# Altium PCB PCB_AUTOOSCILANTE.PcbDoc
Units mil, origin at the board's own origin, x right, y up, seen from the top; angles counter-clockwise.
Board outline 7100 x 2840 mil, 2 copper layers (Top Layer, Bottom Layer); 131 components, 66 nets, 340 pads, 92 vias.
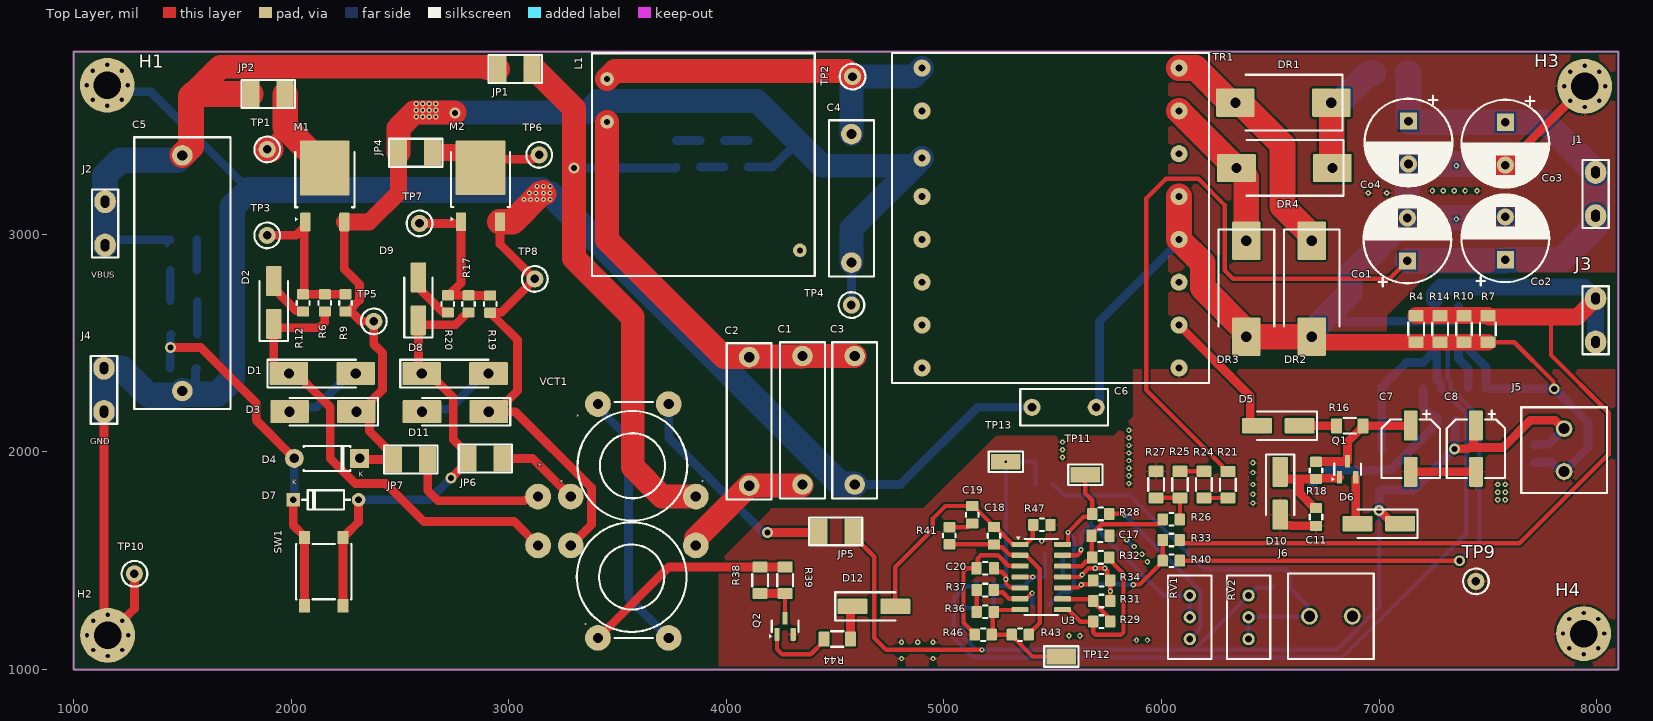
[diagram p0: Top Layer view]
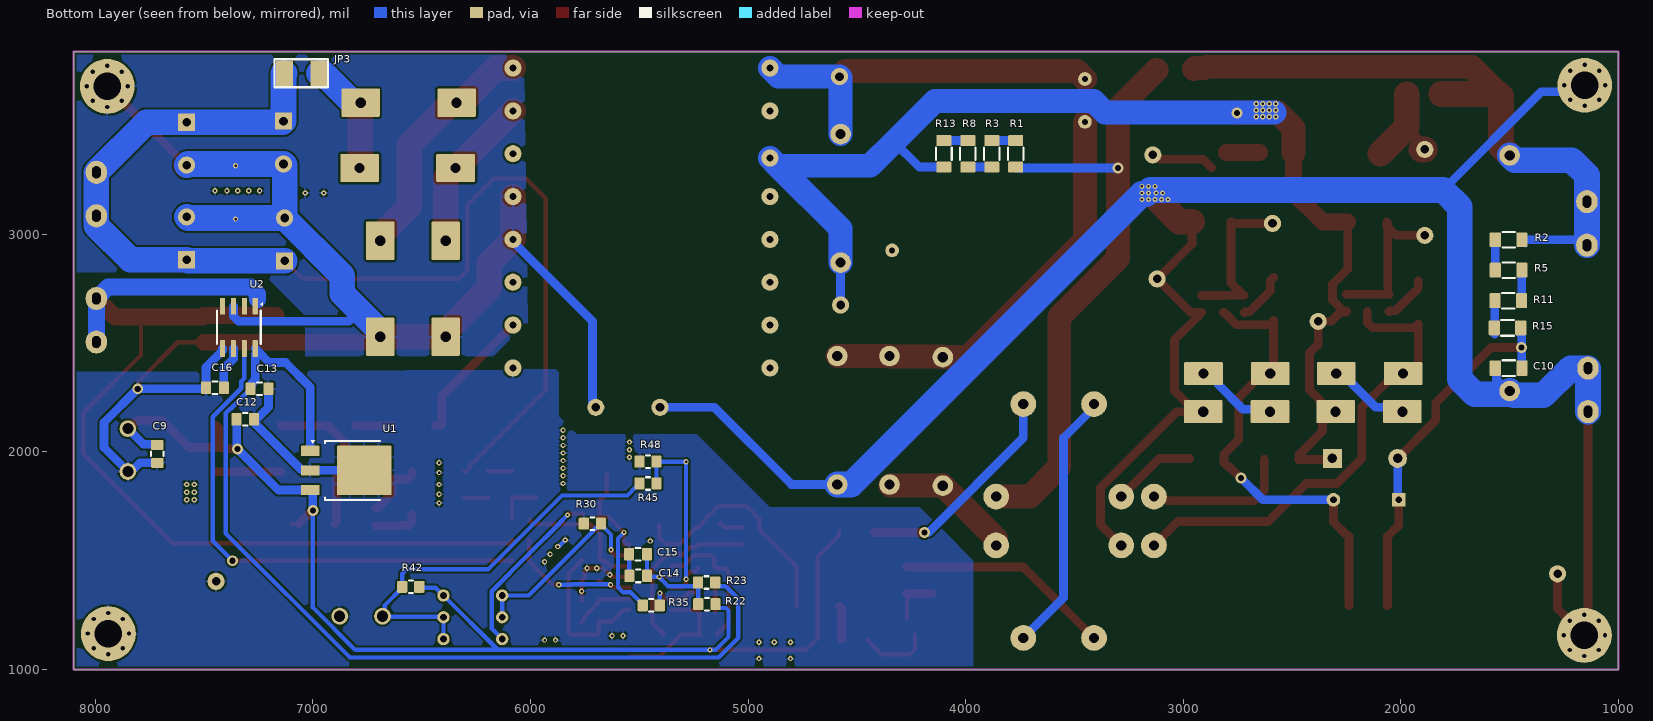
[diagram p1: Bottom Layer view, seen from below]

## Layer stack, top to bottom
Top Solder: solder mask 0.4, Solder Resist, Dk 3.5
Top Layer: signal copper 1.4
Dielectric 1: dielectric 12.6, FR-4, Dk 4.8
Bottom Layer: signal copper 1.4
Bottom Solder: solder mask 0.4, Solder Resist, Dk 3.5

## Board outline
1000,1000 8100,1000 8100,3840 1000,3840

## Design rules (kind name [scope] priority, off if disabled: settings)
Clearance [All] p1: gap=10 ignorepadtopadclearanceinfootprint=FALSE
HoleSize [All] p1: absolutevalues=TRUE maxlimit=150 minlimit=1 maxpercent=80.000 minpercent=20.000
MinimumSolderMaskSliver [All] p1: minsoldermaskwidth=5
NetAntennae [All] p1: netantennaetolerance=100
PolygonConnect [All] p1: connectstyle=Relief reliefconductorwidth=10 reliefentries=4 polygonreliefangle="90 Angle" airgapwidth=10
RoutingVias [All] p1: holewidth=28 width=50 viastyle="Through Hole" minholewidth=10 minwidth=20 maxholewidth=28 maxwidth=50
SilkToSilkClearance [All] p1: silktosilkclearance=5
SilkToSolderMaskClearance [IsPad] p1: minsilkscreentomaskgap=0 clearancetoexposedcopper=TRUE
SolderMaskExpansion [All] p1: expansion=0 istentingtop=FALSE
SupplyNets "Schematic Supply Nets_2" [InNet('i-')] p1: voltage=0.000
SupplyNets "Schematic Supply Nets_1" [InNet('Vcc')] p2: voltage=0.000
SupplyNets "Schematic Supply Nets" [InNet('GND')] p3: voltage=0.000
Width [All] p1: maxlimit=200 minlimit=20 preferedwidth=20 minimp=50.000000 maximp=50.000000 favimp=50.000000
25 further rules are at their usual default settings.

## Components (designator, comment, footprint, x,y, rotation, side; value= is the part's Value field where it differs from the comment)
C1 "~" C_Rect_L18.0mm_W5.0mm_P15.00mm_FKS3_FKP3 4350,1850 r90 top
C2 "~" C_Rect_L18.0mm_W5.0mm_P15.00mm_FKS3_FKP3 4105,1845 r90 top
C3 "~" C_Rect_L18.0mm_W5.0mm_P15.00mm_FKS3_FKP3 4590,1850 r90 top
C4 "~" C_Rect_L18.0mm_W5.0mm_P15.00mm_FKS3_FKP3 4575,2870 r90 top
C5 "1uF" C_Rect_L31.5mm_W11.0mm_P27.50mm_MKS4 1500,3362.68 r270 top
C6 "~" C_Rect_L10.0mm_W4.0mm_P7.50mm_MKS4 5700,2205 r180 top
C7 "C_Polarized_Small" CP_Elec_6.3x5.7 7145,2015 r270 top
C8 "C_Polarized_Small" CP_Elec_6.3x5.7 7445,2015 r270 top
C9 "~" C_0805_2012Metric_Pad1.18x1.45mm_HandSolder 7715,1990.85 r270 bottom
C10 "C_Small" C_1206_3216Metric_Pad1.33x1.80mm_HandSolder 1505,2385 r180 bottom
C11 "~" C_0805_2012Metric_Pad1.18x1.45mm_HandSolder 6710,1700.85 r270 top
C12 "~" C_0805_2012Metric_Pad1.18x1.45mm_HandSolder 7310.85,2150 r0 bottom
C13 "~" C_0805_2012Metric_Pad1.18x1.45mm_HandSolder 7245,2290 r0 bottom
C14 "~" C_0805_2012Metric_Pad1.18x1.45mm_HandSolder 5505,1430 r180 bottom
C15 "~" C_0805_2012Metric_Pad1.18x1.45mm_HandSolder 5505.85,1530 r180 bottom
C16 "~" C_0805_2012Metric_Pad1.18x1.45mm_HandSolder 7450,2295 r180 bottom
C17 "~" C_0805_2012Metric_Pad1.18x1.45mm_HandSolder 5719.15,1615 r180 top
C18 "~" C_0805_2012Metric_Pad1.18x1.45mm_HandSolder 5230,1615 r270 top
C19 "~" C_0805_2012Metric_Pad1.18x1.45mm_HandSolder 5130,1710.85 r270 top
C20 "~" C_0805_2012Metric_Pad1.18x1.45mm_HandSolder 5190,1465 r0 top
Co1 "C_Polarized_Small" CP_Radial_D10.0mm_P5.00mm 7130,2878.15 r90 top
Co2 "C_Polarized_Small" CP_Radial_D10.0mm_P5.00mm 7580,2883.15 r90 top
Co3 "C_Polarized_Small" CP_Radial_D10.0mm_P5.00mm 7580,3515 r270 top
Co4 "C_Polarized_Small" CP_Radial_D10.0mm_P5.00mm 7135,3520 r270 top
D1 "D_Zener_Small_Filled" D_MELF-RM10_Universal_Handsoldering 2143.54,2360 r0 top
D2 "D_Small_Filled" D_SMA_Handsoldering 1920,2686.57 r90 top
D3 "D_Zener_Small_Filled" D_MELF-RM10_Universal_Handsoldering 2146.46,2185 r180 top
D4 "D_Small_Filled" D_DO-41_SOD81_P7.62mm_Horizontal 2315,1970 r180 top
D5 "D_Small_Filled" D_SMA_Handsoldering 6536.57,2120 r180 top
D6 "D_Small_Filled" D_SMA_Handsoldering 6998.43,1670 r180 top
D7 "DIAC" D_DO-35_SOD27_P7.62mm_Horizontal 2010,1780 r0 top
D8 "D_Zener_Small_Filled" D_MELF-RM10_Universal_Handsoldering 2753.54,2360 r0 top
D9 "D_Small_Filled" D_SMA_Handsoldering 2585,2703.43 r90 top
D10 "D_Zener_Small_Filled" D_SMA_Handsoldering 6545,1810 r270 top
D11 "D_Zener_Small_Filled" D_MELF-RM10_Universal_Handsoldering 2755,2185 r180 top
D12 "D_Small_Filled" D_SMA_Handsoldering 4678.43,1290 r0 top
DR1 "D_Small_Filled" D_SMC-RM10_Universal_Handsoldering 6560,3605 r180 top
DR2 "D_Small_Filled" D_SMC-RM10_Universal_Handsoldering 6690.24,2750.24 r270 top
DR3 "D_Small_Filled" D_SMC-RM10_Universal_Handsoldering 6390,2750 r270 top
DR4 "D_Small_Filled" D_SMC-RM10_Universal_Handsoldering 6565,3305 r180 top
H1 "GND" MountingHole_3.2mm_M3_Pad_Via 1155,3685 r0 top
H2 "GND" MountingHole_3.2mm_M3_Pad_Via 1156.81,1156.81 r0 top
H3 "GND" MountingHole_3.2mm_M3_Pad_Via 7945,3680 r0 top
H4 "GND" MountingHole_3.2mm_M3_Pad_Via 7940,1165 r0 top
J1 "Conn_01x02" Faston_5mm 7995,3185 r90 top
J2 "Vbus" Faston_5mm 1145,3050 r90 top
J3 "Conn_01x02" Faston_5mm 7995,2605 r90 top
J4 "GND" Faston_5mm 1140,2285 r90 top
J5 "Conn_01x02" KRE02 7850,2106.85 r270 top
J6 "Conn_01x02" KRE02 6680,1245 r0 top
JP1 "iR" Jumper_Corrente_1mm 3107.48,3760 r0 top
JP2 "iD1" Jumper_Corrente_1mm 1972.48,3645 r0 top
JP3 "iSec" Jumper_Corrente_1mm 7130,3740 r0 bottom
JP4 "iD2" Jumper_Corrente_1mm 2650,3375 r0 top
JP5 "SolderJumper_2_Open" Jumper_Corrente_1mm 4425,1635 r180 top
JP6 "iS1" Jumper_Corrente_1mm 2970,1970 r0 top
JP7 "iS2" Jumper_Corrente_1mm 2627.48,1965 r0 top
L1 "~" EFD_25_13_09_PIN-1-2-10 3895,3320 r0 top
M1 "NMOS" TO-252-2 2155,3255 r90 top
M2 "NMOS" TO-252-2 2870.04,3256.34 r90 top
Q1 "BC817" SOT-23 6855,1920 r90 top
Q2 "BC817" SOT-23 4270,1198.09 r90 top
R1 "~" R_1206_3216Metric_Pad1.30x1.75mm_HandSolder 3770,3370 r270 bottom
R2 "~" R_1206_3216Metric_Pad1.30x1.75mm_HandSolder 1505,2975 r180 bottom
R3 "~" R_1206_3216Metric_Pad1.30x1.75mm_HandSolder 3880,3370 r90 bottom
R4 "~" R_1206_3216Metric_Pad1.30x1.75mm_HandSolder 7170,2565 r270 top
R5 "~" R_1206_3216Metric_Pad1.30x1.75mm_HandSolder 1505,2835 r0 bottom
R6 "~" R_0805_2012Metric_Pad1.20x1.40mm_HandSolder 2155,2685 r270 top
R7 "~" R_1206_3216Metric_Pad1.30x1.75mm_HandSolder 7500,2565 r270 top
R8 "~" R_1206_3216Metric_Pad1.30x1.75mm_HandSolder 3990,3370 r270 bottom
R9 "~" R_0805_2012Metric_Pad1.20x1.40mm_HandSolder 2250,2685 r90 top
R10 "~" R_1206_3216Metric_Pad1.30x1.75mm_HandSolder 7390,2565 r270 top
R11 "~" R_1206_3216Metric_Pad1.30x1.75mm_HandSolder 1506.02,2695 r180 bottom
R12 "~" R_0805_2012Metric_Pad1.20x1.40mm_HandSolder 2055,2685 r270 top
R13 "~" R_1206_3216Metric_Pad1.30x1.75mm_HandSolder 4100,3370 r90 bottom
R14 "~" R_1206_3216Metric_Pad1.30x1.75mm_HandSolder 7280,2565 r270 top
R15 "~" R_1206_3216Metric_Pad1.30x1.75mm_HandSolder 1510,2570 r0 bottom
R16 "10R" R_1206_3216Metric_Pad1.30x1.75mm_HandSolder 6865,2120 r180 top
R17 "~" R_0805_2012Metric_Pad1.20x1.40mm_HandSolder 2815,2680 r270 top
R18 "3k6" R_0805_2012Metric_Pad1.20x1.40mm_HandSolder 6710,1915 r270 top
R19 "~" R_0805_2012Metric_Pad1.20x1.40mm_HandSolder 2915,2679.37 r90 top
R20 "~" R_0805_2012Metric_Pad1.20x1.40mm_HandSolder 2720,2680 r270 top
R21 "~" R_1206_3216Metric_Pad1.30x1.75mm_HandSolder 6305,1848.98 r90 top
R22 "10R" R_0805_2012Metric_Pad1.20x1.40mm_HandSolder 5189.37,1300 r0 bottom
R23 "10R" R_0805_2012Metric_Pad1.20x1.40mm_HandSolder 5190.63,1400 r0 bottom
R24 "~" R_1206_3216Metric_Pad1.30x1.75mm_HandSolder 6195,1850 r270 top
R25 "~" R_1206_3216Metric_Pad1.30x1.75mm_HandSolder 6085,1850 r90 top
R26 "10R" R_0805_2012Metric_Pad1.20x1.40mm_HandSolder 6045,1690 r0 top
R27 "~" R_1206_3216Metric_Pad1.30x1.75mm_HandSolder 5975,1850 r270 top
R28 "10R" R_0805_2012Metric_Pad1.20x1.40mm_HandSolder 5720.63,1715 r180 top
R29 "10R" R_0805_2012Metric_Pad1.20x1.40mm_HandSolder 5725,1220 r180 top
R30 "10R" R_0805_2012Metric_Pad1.20x1.40mm_HandSolder 5715.63,1670 r0 bottom
R31 "10R" R_0805_2012Metric_Pad1.20x1.40mm_HandSolder 5725,1315 r180 top
R32 "10R" R_0805_2012Metric_Pad1.20x1.40mm_HandSolder 5720.63,1515 r180 top
R33 "10R" R_0805_2012Metric_Pad1.20x1.40mm_HandSolder 6045,1595 r180 top
R34 "10R" R_0805_2012Metric_Pad1.20x1.40mm_HandSolder 5725,1410 r0 top
R35 "10R" R_0805_2012Metric_Pad1.20x1.40mm_HandSolder 5445,1295 r180 bottom
R36 "10R" R_0805_2012Metric_Pad1.20x1.40mm_HandSolder 5190,1265 r0 top
R37 "10R" R_0805_2012Metric_Pad1.20x1.40mm_HandSolder 5190,1365 r180 top
R38 "~" R_1206_3216Metric_Pad1.30x1.75mm_HandSolder 4155,1410 r270 top
R39 "~" R_1206_3216Metric_Pad1.30x1.75mm_HandSolder 4270,1410 r270 top
R40 "10R" R_0805_2012Metric_Pad1.20x1.40mm_HandSolder 6045,1500 r180 top
R41 "10R" R_0805_2012Metric_Pad1.20x1.40mm_HandSolder 5025,1615 r90 top
R42 "10R" R_0805_2012Metric_Pad1.20x1.40mm_HandSolder 6550,1380 r0 bottom
R43 "10R" R_0805_2012Metric_Pad1.20x1.40mm_HandSolder 5350.63,1160 r0 top
R44 "10R" R_1206_3216Metric_Pad1.30x1.75mm_HandSolder 4510,1140 r180 top
R45 "10R" R_0805_2012Metric_Pad1.20x1.40mm_HandSolder 5460,1855 r180 bottom
R46 "10R" R_0805_2012Metric_Pad1.20x1.40mm_HandSolder 5180.63,1160 r180 top
R47 "10R" R_0805_2012Metric_Pad1.20x1.40mm_HandSolder 5450,1665 r0 top
R48 "10R" R_0805_2012Metric_Pad1.20x1.40mm_HandSolder 5460,1955 r0 bottom
RV1 "R_Potentiometer_Small" Potentiometer_Bourns_3296W_Vertical 6130,1340 r90 top
RV2 "R_Potentiometer_Small" Potentiometer_Bourns_3296W_Vertical 6400,1340 r90 top
SW1 "SW_Push" SW_SPST_PTS645 2150,1450 r90 top
TP1 "VdHS" TestPoint_Loop_D1.80mm_Drill1.0mm_Beaded 1890,3390 r0 top
TP2 "Rac1" TestPoint_Loop_D1.80mm_Drill1.0mm_Beaded 4580,3725 r0 top
TP3 "VgHS" TestPoint_Loop_D1.80mm_Drill1.0mm_Beaded 1890,2995 r0 top
TP4 "Rac2" TestPoint_Loop_D1.80mm_Drill1.0mm_Beaded 4575,2675 r0 top
TP5 "VsHS" TestPoint_Loop_D1.80mm_Drill1.0mm_Beaded 2380,2600 r0 top
TP6 "VdLS" TestPoint_Loop_D1.80mm_Drill1.0mm_Beaded 3140,3365 r0 top
TP7 "VgLS" TestPoint_Loop_D1.80mm_Drill1.0mm_Beaded 2590,3050 r0 top
TP8 "VsLS" TestPoint_Loop_D1.80mm_Drill1.0mm_Beaded 3120,2795 r0 top
TP9 "Earth" TestPoint_Loop_D1.80mm_Drill1.0mm_Beaded 7445,1405 r0 top
TP10 "GND" TestPoint_Loop_D1.80mm_Drill1.0mm_Beaded 1280,1440 r0 top
TP11 "y" "Test Pad SMD" 5650,1895 r0 top
TP12 "erro" "Test Pad SMD" 5540,1060 r0 top
TP13 "ref" "Test Pad SMD" 5285,1955 r0 top
TR1 "TRX_LLC_16pin" EE_35_18_12 5490,3075 r0 top
U1 "L7805" TO-252-3_TabPin2 6813.66,1915.04 r0 bottom
U2 "ACS712xLCTR-05B" SOIC-8_3.9x4.9mm_P1.27mm 7340,2572.44 r90 bottom
U3 "Opamp_Quad" SOIC-14_3.9x8.7mm_P1.27mm 5447.44,1425 r0 top
VCT1 "VCT" Toroidal_2xD12.5mm_VCT 3710,1970 r270 top

## Footprints (in the part's own frame and the unit in brackets; to place one, negate y for a bottom-side part, rotate by r counter-clockwise, add the part's x,y. Pads: shape width x height; smd on the part's side, far side on the other; paste and mask are expansions set on the pad)
C_0805_2012Metric_Pad1.18x1.45mm_HandSolder [mm]
  rrect21% 1.175x1.45 smd mask+0: 1(1.038,0) 2(-1.038,0)
  silkscreen extent -0.26,-0.73 0.26,0.73
C_1206_3216Metric_Pad1.33x1.80mm_HandSolder [mm]
  rrect19% 1.325x1.8 smd mask+0: 1(1.562,0) 2(-1.562,0)
  silkscreen extent -0.71,-0.91 0.71,0.91
C_Rect_L10.0mm_W4.0mm_P7.50mm_MKS4 [mm]
  round 2 hole 1 paste-2539.97 mask+0: 1(0,0) 2(7.5,0)
  silkscreen extent -1.37,-2.12 8.87,2.12
C_Rect_L18.0mm_W5.0mm_P15.00mm_FKS3_FKP3 [mm]
  round 2.4 hole 1.2 paste-2539.97 mask+0: 1(0,0) 2(15,0)
  silkscreen extent -1.62,-2.62 16.62,2.62
C_Rect_L31.5mm_W11.0mm_P27.50mm_MKS4 [mm]
  round 2.4 hole 1.2 paste-2539.97 mask+0: 1(0,0) 2(27.5,0)
  silkscreen extent -2.12,-5.62 29.62,5.62
CP_Elec_6.3x5.7 [mm]
  rrect16% 3.5x1.6 smd mask+0: 1(-2.7,0) 2(2.7,0)
  silkscreen extent -4.44,-3.41 3.41,3.41
CP_Radial_D10.0mm_P5.00mm [mm]
  rect 2x2 hole 1 paste-2539.97 mask+0: 1(0,0)
  round 2 hole 1 paste-2539.97 mask+0: 2(5,0)
  silkscreen extent -2.98,-5.12 7.62,5.12
D_DO-35_SOD27_P7.62mm_Horizontal [mm]
  rect 1.6x1.6 hole 0.8 paste-2539.97 mask+0: 1(0,0)
  rrect100% 1.6x1.6 hole 0.8 paste-2539.97 mask+0: 2(7.62,0)
  silkscreen extent 1.04,-1.12 6.58,1.12
D_DO-41_SOD81_P7.62mm_Horizontal [mm]
  rect 2.2x2.2 hole 1.1 paste-2539.97 mask+0: 1(0,0)
  rrect100% 2.2x2.2 hole 1.1 paste-2539.97 mask+0: 2(7.62,0)
  silkscreen extent 1.09,-1.47 6.53,1.47
D_MELF-RM10_Universal_Handsoldering [mm]
  rrect9% 4.5x2.7 hole 1.199 paste-2539.97 mask+0: 1(-3.9,0) 2(3.9,0)
  silkscreen extent -6.41,-1.61 3.9,1.61
D_SMA_Handsoldering [mm]
  rrect14% 3.5x1.8 smd mask+0: 1(-2.5,0) 2(2.5,0)
  silkscreen extent -4.51,-1.65 2.5,1.65
D_SMC-RM10_Universal_Handsoldering [mm]
  rrect8% 4.5x3.3 hole 1.2 paste-2539.97 mask+0: 1(-5.6,0) 2(5.6,0)
  silkscreen extent -6.91,-3.25 4.4,3.25
EE_35_18_12 [mm]
  round 2 hole 0.8 paste-2539.97 mask+0: 1(-15,17.5) 2(-15,12.5) 3(-15,7) 4(-15,2.5) 5(-15,-2.5) 6(-15,-7.5) 7(-15,-12.5) 8(-15,-17.5) 9(15,-17.5) 10(15,-12.5) 11(15,-7.5) 12(15,-2.5) 13(15,2.5) 14(15,7.5) 15(15,12.5) 16(15,17.5)
  silkscreen extent -18.5,-19.25 18.5,19.25
EFD_25_13_09_PIN-1-2-10 [mm]
  round 1.6 hole 0.7 paste-2539.97 mask+0: 1(-11.25,9.997) 2(-11.25,4.997) 10(11.25,-10.003)
  silkscreen extent -13.01,-13 13,13
Faston_5mm [mm]
  rrect100% 2.7x2.5 hole 1 slot 1.4 at 0 deg paste-2539.97 mask+0: 1(-2.54,0) 2(2.54,0)
  silkscreen extent -3.96,-1.54 3.96,1.54
Jumper_Corrente_1mm [mm]
  rect 2x3 smd paste-3 mask+0: 1(0,0) 2(-4,0)
  silkscreen extent -5.08,-1.63 1.16,1.63
KRE02 [mm]
  round 1.95 hole 1.3 paste-2539.97 mask+0: 1(0,0) 2(5,0)
  silkscreen extent -2.5,-5 7.5,5
MountingHole_3.2mm_M3_Pad_Via [mm]
  round 0.8 hole 0.5 paste-2539.97 mask+0: 1(-2.4,0) 1(-1.697,-1.697) 1(-1.697,1.697) 1(0,-2.4) 1(0,2.4) 1(1.697,-1.697) 1(1.697,1.697) 1(2.4,0)
  round 6.4 hole 3.2 paste-2539.97 mask+0: 1(0,0)
Potentiometer_Bourns_3296W_Vertical [mm]
  round 1.44 hole 0.8 paste-2539.97 mask+0: 1(0,0) 2(-2.54,0) 3(-5.08,0)
  silkscreen extent -7.42,-2.54 2.34,2.53
R_0805_2012Metric_Pad1.20x1.40mm_HandSolder [mm]
  rrect21% 1.2x1.4 smd mask+0: 1(1,0) 2(-1,0)
  silkscreen extent -0.23,-0.73 0.23,0.73
R_1206_3216Metric_Pad1.30x1.75mm_HandSolder [mm]
  rrect19% 1.3x1.75 smd mask+0: 1(1.55,0) 2(-1.55,0)
  silkscreen extent -0.73,-0.91 0.73,0.91
SOIC-8_3.9x4.9mm_P1.27mm [mm]
  rrect25% 1.95x0.6 smd mask+0: 1(2.475,-1.905) 2(2.475,-0.635) 3(2.475,0.635) 4(2.475,1.905) 5(-2.475,1.905) 6(-2.475,0.635) 7(-2.475,-0.635) 8(-2.475,-1.905)
  silkscreen extent -1.95,-2.8 2.94,2.56
SOIC-14_3.9x8.7mm_P1.27mm [mm]
  rrect25% 1.95x0.6 smd mask+0: 1(-2.475,3.81) 2(-2.475,2.54) 3(-2.475,1.27) 4(-2.475,0) 5(-2.475,-1.27) 6(-2.475,-2.54) 7(-2.475,-3.81) 8(2.475,-3.81) 9(2.475,-2.54) 10(2.475,-1.27) 11(2.475,0) 12(2.475,1.27) 13(2.475,2.54) 14(2.475,3.81)
  silkscreen extent -2.94,-4.44 1.95,4.7
SOT-23 [mm]
  rrect25% 1.475x0.6 smd mask+0: 1(-0.937,0.95) 2(-0.937,-0.95) 3(0.937,0)
  silkscreen extent -1.4,-1.56 0.65,1.84
SW_SPST_PTS645 [mm]
  rect 1.55x1.3 smd mask+0: 1(-3.98,2.25) 1(3.98,2.25) 2(-3.98,-2.25) 2(3.98,-2.25)
  silkscreen extent -3.23,-3.23 3.23,3.23
"Test Pad SMD" [mm]
  rect 3.45x1.85 smd mask+0: 1(0,0)
  silkscreen extent -2,-1.2 2,1.2
TestPoint_Loop_D1.80mm_Drill1.0mm_Beaded [mm]
  round 2 hole 1 paste-2539.97 mask+0: 1(0,0)
  silkscreen extent -1.5,-1.5 1.5,1.5
TO-252-2 [mm]
  rrect21% 2.2x1.2 smd mask+0: 1(-5.04,2.28) 3(-5.04,-2.28)
  rrect9% 3.05x2.75 smd mask-3.05: 2(-0.415,1.525) 2(-0.415,-1.525) 2(2.935,-1.525) 2(2.935,1.525)
  rrect4% 6.4x5.8 smd paste-6.4 mask+0: 2(1.26,0)
  silkscreen extent -4.97,-3.45 3.11,3.47
TO-252-3_TabPin2 [mm]
  rrect21% 2.2x1.2 smd mask+0: 1(5.04,-2.28) 2(5.04,0) 3(5.04,2.28)
  rrect9% 3.05x2.75 smd mask-3.05: 2(-2.935,-1.525) 2(-2.935,1.525) 2(0.415,-1.525) 2(0.415,1.525)
  rrect4% 6.4x5.8 smd paste-6.4 mask+0: 2(-1.26,0)
  silkscreen extent -3.11,-3.49 4.96,3.45
Toroidal_2xD12.5mm_VCT [mm]
  round 3 hole 1.2 paste-2539.97 mask+0: 1(4.445,3.81) 2(10.16,3.81) 3(4.445,-10.795) 4(10.16,-10.795) 5(4.445,-14.605) 6(10.16,-14.605) 7(20.955,-7.62) 8(20.955,0.635) 9(-6.35,-7.62) 10(-6.35,0.635)
  silkscreen extent -6.6,-10.08 20.95,2.81

## Part data
C1 C2 C3 C4 C5 C6 C9 C11 C12 C13 C14 C15 C16 C17 C18 C19 C20: library part C_Small
H1 H2 H3 H4: library part MountingHole_Pad
J2 J4: library part Conn_01x02
JP1 JP2 JP3 JP4 JP6 JP7: library part SolderJumper_2_Open
L1: library part L
R1 R2 R3 R4 R5 R6 R7 R8 R9 R10 R11 R12 R13 R14 R15 R16 R17 R18 R19 R20 R21 R22 R23 R24 R25 R26 R27 R28 R29 R30 R31 R32 R33 R34 R35 R36 R37 R38 R39 R40 R41 R42 R43 R44 R45 R46 R47 R48: library part R_Small
TP1 TP2 TP3 TP4 TP5 TP6 TP7 TP8 TP9 TP10 TP11 TP12 TP13: library part TestPoint_Probe
TR1: library part TRX_LLC_16pin_2aux
VCT1: library part CT_LP_LS1_LS2_Laux
D2 D4 D5 D6 D9 D12 DR1 DR2 DR3 DR4: Sim.Device=D, Sim.Pins="1=K 2=A"
U3: Sim.Device=SUBCKT, Sim.Library=${KICAD7_SYMBOL_DIR}/Simulation_SPICE.sp, Sim.Name=kicad_builtin_opamp_quad, Sim.Pins="1=out1 2=in1- 3=in1+ 4=vcc 5=in2+ 6=in2- 7=out2 8=out3 9=in3- 10=in3+ 11=vee 12=in4+ 13=in4- 14=out4"

## Via types
v1: diameter 24, hole 11, Top Layer to Bottom Layer, 83 vias
v2: diameter 50, hole 28, Top Layer to Bottom Layer, 9 vias

## Nets (pads, with @x,y where several pads share a name; then routed paths per layer and width w, separated by ;. In a path a pad name is that pad's centre, name@x,y a point inside that pad or via, vN(x,y) a via of type N, cw(c..) or ccw(c..) an arc to the next point about the centre after c; other vN are vias at no path point)
5Vcc: C13.1 R23.2 U1.1 U2.8 | length 4474.6
  Bottom Layer w20: R23.2 5151.26,1396.06 5137.64,1382.44 5102.44,1382.44 5045,1325 5045,1145 5135,1055 6830,1055 7400,1625 7400,2178.81 7380.26,2198.54 7377.3,2198.54 C13.1 ; U2.8@7265,2448.43 U2.8
  Bottom Layer w40: U1.1 7012.09,2297.09 7126.25,2411.25 7201.25,2411.25 7251.71,2461.71 U2.8 ; U2.8@7265,2448.43 7265,2331.39 7282.72,2313.67 7282.72,2293.13 C13.1
ACS: R40.2 U2.7 | length 2358
  Top Layer w20: R40.2 v2(7370,1500)
  Bottom Layer w20: U2.7 7315,2337.96 7328.98,2323.98 7328.98,2292.26 7460,2161.23 7460,1590 v2(7370,1500)
erro: R36.1 R43.2 R46.2 TP12.1 U3.7 | length 597.4
  Top Layer w20: U3.7 5348.19,1273.19 5237.56,1273.19 R36.1 5224.69,1260.31 5224.69,1164.68 R46.2 R43.2 5311.26,1156.06 5407.32,1060 TP12.1
GND: C3.1 C5.2 C6.2 C10.2 D11.1 H1.1 H2.1 J4.1 J4.2 M2.3 R19.2 TP8.1 TP10.1 VCT1.4 | length 10862.7
  Top Layer w20: H2.1@1140,1173.63 1156.81,1156.81 H2.1@1223.63,1223.63
  Top Layer w40: H2.1@1140,1173.63 J4.1 ; H2.1@1223.63,1223.63 1280,1280 TP10.1 ; D11.1 D11.1@2943.98,2185 ; R19.2 2916.56,2641.56 2966.56,2641.56 TP8.1 2959.8,2955.2 M2.3 ; R19.2@2918.94,2640 2932.56,2626.38 2932.56,2622.44 3040,2515 3040,2281.02 D11.1@2943.98,2185 ; VCT1.4 3380,1665 3380,1835 3030,2185 D11.1@2943.98,2185
  Top Layer w100: 3145,3185 v1@3170,3185 ; v1@3157.5,3197.5 v1@3160,3200
  Top Layer w118: M2.3 3017.91,3057.91 3145,3185
  Bottom Layer w20: H1.1@1200,3640 1221.81,3618.19 H1.1@1253.63,3650 ; C5.2 1520,2280 C5.2@1520,2291.81
  Bottom Layer w40: H1.1@1155,3685 1170,3685 1200,3655 1253.63,3655 1355,3655 1806.77,3203.23 ; C5.2@1520,2291.81 1560.43,2332.24 1560.43,2378.92 C10.2 ; C3.1 4800,1850 5155,2205 C6.2
  Bottom Layer w118: J4.1 J4.2 1220,2385 1345,2260 1480,2260 C5.2 1515,2265 1660.88,2265 1730,2334.12 1730,3126.47 1806.77,3203.23 3070,3203.23 3151.77,3203.23 3170,3185 3191.16,3185 4526.16,1850 C3.1
  other v1: 3070,3160 3100,3160 3130,3160 3160,3160 3190,3160 3095,3190 3125,3190 3160,3190 3190,3190 3130,3220 3160,3220 3190,3220
i+: J3.1 J3.2 R4.2 R7.2 R10.2 R14.2 R33.2 U2.1 | length 4751.9
  Top Layer w20: R33.2 6084.37,1593.62 6097.99,1580 7645,1580 8055,1990 8055,2180 7790,2445 7790,2620.43
  Top Layer w78: R4.2 R14.2 R10.2 R7.2 7505.59,2620.43 7790,2620.43 7910.43,2620.43 J3.2
  Bottom Layer w78: U2.1@7254.19,2700 7254.19,2726.83 7284.62,2757.27 7941.14,2757.27 7993.41,2705 J3.2 J3.1
i-: C6.1 C7.2 C8.2 C9.1 C11.1 C12.2 C13.2 C14.2 C15.2 C16.2 C17.2 C20.2 Co1.2 Co2.2 Co3.2 Co4.2 D10.2 DR2.2 DR3.2 H3.1 H4.1 J5.2 J6.2 Q2.2 R4.1 R7.1 R10.1 R14.1 R27.2 R30.1 R31.2 R34.1 R46.1 R47.1 R48.1 TP9.1 TR1.9 TR1.12 TR1.13 U1.2 U2.3 U2.5 U3.3 U3.11 | length 9889.9
  Top Layer w20: R46.1 5141.26,1163.94 5090,1215.2 5090,1450 5105,1465 C20.2 5155.11,1470.95 5155.11,1510.3 5169.81,1525 5247.96,1525 5296.15,1476.81 5348.19,1476.81 U3.3 ; U3.11 5624.07,1425 v1@5634.54,1435.46 ; v1(5635,1435) 5635,1435.93 5664.07,1465 v1(5695,1465) ; v1@5695.22,1465.22 5695.44,1465 v1(5740,1465) 5740,1463.92 5750.75,1453.17 5750.75,1423.62 5764.69,1409.69 5764.69,1360.32 v1(5765,1360) 5764.69,1359.68 5764.69,1315.31 R31.2 ; R7.1 7621.02,2503.98 7801.11,2323.89 7801.11,2293.89 v2(7805,2290)
  Top Layer w40: D10.2 6545,1678.11 6560.43,1662.68 6593.9,1662.68 6596.57,1660 C11.1 ; C7.2 C8.2 ; Co3.2@7583.15,3318.15 7878.19,3613.19 H3.1@7945,3680
  Top Layer w78: 6188.92,2754.23 6188.92,2754.7 ; DR2.2 6716.02,2503.98 R4.1 R14.1 R10.1 R7.1
  Top Layer w118: TR1.13 TR1.12 6188.92,2868.2 6188.92,2754.7 ; 6188.92,2754.23 DR3.2@6390,2553.15 ; DR3.2 6390.12,2529.65 6690.12,2529.65 DR2.2 ; Co3.2 Co3.2@7583.15,3318.15
  Bottom Layer w20: C14.2 5546.27,1430.42 5546.27,1529.58 C15.2 ; v1(5840,1595) 5870,1565 v1(5875,1565)
  Bottom Layer w40: C6.1 5700,2205.2 5715,2220.2 5715,2600 6061.18,2946.18 6061.18,2946.72 6080.55,2966.09 TR1.12 ; U1.2@6688.11,1845 U1.2@6698.11,1855 ; U1.2@6764.06,1915.04 7012.09,1915.04 7015.71,1918.66 7053.66,1918.66 7266.87,2131.87 7266.87,2146.87 C12.2 ; 6785.93,2649.07 6835,2600 7341.57,2600 7365,2623.43 U2.3 ; C13.2 7204.15,2205.85 7251.46,2158.54 C12.2@7266.87,2158.54 ; U2.5 7415,2464.8 7490.85,2388.96 C16.2 ; C16.2@7490.85,2293.13 7493.98,2290 v2(7805,2290) 7960,2135 7960,2020 J5.2 7834.64,1910 7794.64,1950 C9.1
  Bottom Layer w118: DR2.2 6696.2,2535.72 6696.2,2559.35 6785.93,2649.07 6865,2728.15 6865,2810 Co1.2 ; Co2.2 7575,3075 Co1.2 ; Co3.2 7575,3323.15 Co4.2 7130,3318.15 Co1.2
  other v1: 4805,1050 4950,1050 4805,1125 4880,1125 4950,1125 5885,1135 5935,1135 5575,1155 5625,1155 5935,1495 5910,1530 5450,1590 6420,1765 7545,1780 7580,1780 6420,1805 7545,1815 7580,1815 6420,1850 7545,1850 7580,1850 5850,1855 5850,1890 6420,1905 5850,1925 6420,1950 5850,1960 5545,1975 5850,1995 5545,2010 5850,2030 5545,2045 5850,2065 5850,2100 7355,3070 6950,3190 7035,3190 7245,3200 7295,3200 7345,3200 7395,3200 7450,3200 7355,3315
LP1: JP1.1 R1.1 VCT1.1 | length 2828.6
  Top Layer w110: JP1.1@3123.11,3755.94 3300,3579.05 v2(3300,3305) 3300,2890 3570,2620 3570,1930 3705,1795 VCT1.1
  Bottom Layer w40: v2(3300,3305) 3766.02,3305 R1.1
LP2: C1.1 C2.1 VCT1.2 | length 620
  Top Layer w110: VCT1.2 3861.55,1571.55 3861.55,1601.55 C2.1@4107.5,1847.5 ; C2.1 C1.1@4345,1845
LS11: D7.2 D8.1 D9.1 JP6.2 R17.1 SW1.2 | length 2123.2
  Top Layer w40: SW1.2@2238.58,1293.31 2238.58,1611.61 2244.17,1617.2 2249.09,1617.2 2310,1678.11 D7.2 ; v2@2736.91,1881.91 2785.94,1930.94 2793.15,1930.94 2812.52,1950.32 2812.52,1989.68 2745,2057.2 2745,2250.43 2635.43,2360 D8.1 2585,2375 D9.1 2585,2600.43 2600.43,2585 2755.43,2585 2807.44,2637.01 2811.38,2637.01 R17.1
  Bottom Layer w40: D7.2 2635,1780 v2(2735,1880)
LS21: C4.1 D3.1 D4.1 JP4.2 JP7.2 M1.3 R9.2 R13.2 TP4.1 TP5.1 TR1.3 | length 5941.1
  Top Layer w20: D4.1 D4.1@2320,1965 ; D3.1@2335.43,2185 D3.1@2360,2160.43 ; JP7.2 JP7.2@2470,1984.68
  Top Layer w40: M1.3 2244.76,2840.24 2314.13,2770.87 2314.13,2697.8 2265.58,2649.25 2253.62,2649.25 R9.2 2253.62,2642.01 2277.99,2642.01 2319.73,2600.27 2379.73,2600.27 TP5.1 2380,2495 2420,2455 2420,2285 2368.58,2233.58 2368.58,2218.15 2335.43,2185 D3.1 ; D4.1@2320,1965 JP7.2 ; D3.1@2360,2160.43 2360,2094.68 JP7.2@2470,1984.68
  Top Layer w78: M1.3 2358.62,3056.57 2492.52,3190.47 JP4.2@2492.52,3355.32
  Top Layer w110: JP4.2 2492.52,3487.52 2565,3560 v2@2750,3560
  Bottom Layer w40: R13.2 4213.98,3308.98 4330,3425 ; TP4.1 C4.1
  Bottom Layer w110: v1@2581.44,3560 3358.89,3560 3412.12,3613.23 4141.77,3613.23 4330,3425 4440,3315 4863.86,3315 ; C4.1 4575,3026.14 4863.86,3315 ; TR1.3 4863.86,3315
  other v1: 2575,3540 2605,3540 2635,3540 2665,3540 2575,3570 2605,3570 2635,3570 2665,3570 2575,3600 2605,3600 2635,3600 2665,3600
  other v2: 2752.78,3557.48
LS22: D1.1 D2.1 R6.1 VCT1.6 | length 2186.5
  Top Layer w40: R6.1 2155,2595 2130,2570 1938.15,2570 D2.1 1920,2403.15 1963.15,2360 D1.1 2025.43,2360 2068.58,2316.85 2068.58,2316.55 2180,2205.13 2180,1970 2295,1855 2435,1855 2610,1680 3025,1680 VCT1.6
NetC1_2: C1.2 C2.2 C3.2 L1.2 | length 1906.4
  Top Layer w110: L1.2 3452.09,2972.91 3989.45,2435.55 C2.2 4107.5,2438.05 4347.5,2438.05 C1.2 C3.2
NetC4_2: C4.2 L1.1 TP2.1 TR1.1 | length 1755.5
  Top Layer w110: L1.1 3488.5,3750 4555,3750 TP2.1
  Bottom Layer w110: C4.2 4575,3720 TP2.1 4860.47,3725 TR1.1
NetC7_1: C7.1 Q1.3 R16.2 R18.2 | length 561.5
  Top Layer w40: R18.2 6711.27,1955.64 6853.73,1955.64 Q1.3 6855,2045.94 6914.61,2105.55 6920.43,2105.55 6926.02,2111.14 R16.2 7143.7,2120 C7.1
NetC10_1: C10.1 D4.2 D7.1 R15.2 SW1.1 | length 1675.4
  Top Layer w40: v2(1445,2480) 1585,2480 1840,2225 1840,2145 D4.2 ; D7.1 2010,1663.03 2061.42,1611.61 SW1.1@2061.42,1293.31
  Bottom Layer w20: D7.1 D7.1@2015,1785
  Bottom Layer w40: C10.1 1444.24,2385.76 1444.24,2479.24 v2(1445,2480) ; v2@1445,2490 1445,2536.02 R15.2@1448.98,2540 ; D7.1@2015,1785 D4.2
NetC11_2: C11.2 D10.1 Q1.1 R18.1 | length 467.5
  Top Layer w40: D10.1 6545,1891.06 6560.43,1875.63 6635.22,1875.63 ; C11.2 6704.59,1741.69 6635.22,1811.06 6635.22,1875.63 ; Q1.1 6813.76,1879.25 6713.62,1879.25 R18.1 6635.22,1875.63
NetC14_1: C14.1 C15.1 R22.1 R23.1 U3.4 | length 519.3
  Top Layer w20: U3.4 v1(5408,1425)
  Bottom Layer w20: R22.1 5229.37,1300.63 5229.37,1399.37 R23.1 ; R23.1@5230,1396.62 5243.62,1383 5368,1383 5382.14,1397.14 5382.14,1398.06 5408,1423.92 v1(5408,1425) ; v1@5409,1424 5409,1424.92 5409.85,1425.77 5459.92,1425.77 5464.58,1430.42 5464.58,1529.58 C15.1
NetC16_1: C16.1 U2.6 | length 198.3
  Bottom Layer w40: U2.6 7365,2427.7 7409.15,2383.54 C16.1
NetC17_1: C17.1 R26.2 R32.1 U3.12 | length 609.7
  Top Layer w20: U3.12 5631.64,1475 5654.08,1497.44 5667.64,1497.44 5681.26,1511.06 R32.1 ; R32.1@5679.78,1525 5679.78,1613.52 C17.1 5678.31,1620.41 5725.33,1667.44 5980.29,1667.44 5985.29,1672.44 5992.01,1672.44 6005.63,1686.06 R26.2
NetC18_1: C18.1 R41.2 R43.1 U3.2 | length 784.6
  Top Layer w20: R41.2 5025.74,1574.89 5229.26,1574.89 5242.7,1561.45 5268.55,1561.45 5303.19,1526.81 5348.19,1526.81 U3.2 5376.57,1525 5394.07,1507.51 5394.24,1507.51 5440,1461.75 5440,1213.94 5390,1163.94 R43.1
NetC18_2: C18.2 C19.2 D12.2 R47.2 U3.1 | length 1106.5
  Top Layer w20: D12.2 4776.85,1471.85 4949.23,1644.23 4949.23,1694.23 5006.69,1751.69 C19.2 5135.41,1751.69 5211.46,1675.65 5211.46,1668.98 5224.59,1655.85 C18.2 5235.41,1655.85 5314.45,1576.81 5378.39,1576.81 5409.02,1607.44 5409.02,1663.39 R47.2
NetC19_1: C19.1 R41.1 | length 111.5
  Top Layer w20: R41.1 5108.96,1654.37 5124.59,1670 C19.1
NetD1_2: D1.2 D3.2 | length 381.5
  Bottom Layer w40: D3.2 2013.76,2205.85 2115.85,2205.85 2228.5,2318.5 2228.5,2326.85 2261.65,2360 D1.2
NetD2_2: D2.2 R12.1 | length 212.3
  Top Layer w40: D2.2 1920,2751.54 1935.43,2736.1 1936.57,2736.1 2023.42,2649.25 2051.38,2649.25 R12.1
NetD5_1: D5.1 R16.1 | length 169
  Top Layer w40: D5.1 R16.1
NetD5_2: D5.2 TR1.10 | length 626.4
  Top Layer w40: TR1.10 6408.25,2255.17 6408.25,2123.57 6411.82,2120 D5.2
NetD6_2: D6.2 Q1.2 | length 216.2
  Top Layer w40: Q1.2 6892.4,1677.6 D6.2
NetD8_2: D8.2 D11.2 | length 388.9
  Bottom Layer w40: D11.2 2613.06,2196.61 2726.61,2196.61 2838.5,2308.5 2838.5,2326.85 2871.65,2360 D8.2
NetD9_2: D9.2 R20.1 | length 229.2
  Top Layer w40: D9.2 2600.43,2786.42 2600.43,2739.57 2695.75,2644.25 2716.38,2644.25 R20.1
NetD12_1: D12.1 R44.2 | length 153.7
  Top Layer w40: R44.2 4571.02,1281.02 D12.1
NetDR1_1: DR1.1 DR4.1 JP3.2 | length 550
  Top Layer w118: DR1.1 6782.97,3602.5 6782.97,3307.5 DR4.1
  Bottom Layer w118: DR1.1 6786.43,3610.96 6823.91,3610.96 6952.94,3740 JP3.2
NetDR1_2: DR1.2 DR2.1 TR1.16 | length 1118.2
  Top Layer w118: TR1.16 6156.93,3763.98 6315.91,3605 DR1.2 6363.15,3605 6556.04,3412.11 6556.04,3128.53 6690.24,2994.33 DR2.1
NetDR3_1: DR3.1 DR4.2 TR1.15 | length 674.4
  Top Layer w118: TR1.15 6314.94,3332.73 6314.94,3310.96 6320.91,3305 DR4.2 ; DR3.1 DR4.2@6390,3259.53
NetJ6_1: J6.1 R42.1 R45.2 RV2.2 RV2.3 | length 1879.2
  Bottom Layer w20: R45.2 5499.37,1851.06 5512.99,1837.44 5516.93,1837.44 5554.37,1800 5855,1800 6195,1460 6570,1460 6589.37,1440.63 R42.1 6589.37,1376.06 6669.14,1296.3 6669.14,1255.86 J6.1 6677.5,1242.5 6402.5,1242.5 RV2.2 RV2.3
NetJP2_1: JP2.1 M1.2 TP1.1 | length 475.7
  Top Layer w40: TP1.1 1890,3400.48 1909.37,3419.85 1909.37,3428 1973.44,3492.07
  Top Layer w118: TP1.1 TP1.1@1905.21,3390 ; JP2.1@1973.44,3644.04 1973.44,3492.07 M1.2@2094.96,3370.55
NetJP4_1: JP4.1 M2.2 TP6.1 | length 445.4
  Top Layer w40: M2.2@2870.04,3305.94 2909.09,3345 3109.52,3345 3129.52,3365 TP6.1
  Top Layer w78: JP4.1 M2.2@2800.98,3375
NetJP5_1: JP5.1 VCT1.10 | length 1027.3
  Top Layer w20: JP5.1@4420,1630 JP5.1
  Top Layer w40: v2(4190,1630) JP5.1@4420,1630
  Bottom Layer w40: VCT1.10 3735,2065 4168.09,1631.91 4188.09,1631.91 v2(4190,1630)
NetJP6_1: JP6.1 VCT1.3 | length 387.5
  Top Layer w40: JP6.1 3110,1970 VCT1.3
NetJP7_1: JP7.1 VCT1.5 | length 678
  Top Layer w40: JP7.1 2627.48,1822.52 2675,1775 3072.51,1775 3077.57,1780.05 3120.05,1780.05 VCT1.5
NetM1_1: M1.1 R6.2 R9.1 R12.2 TP3.1 | length 743.7
  Top Layer w40: TP3.1 2023.35,2995 2065.24,3036.89 M1.1 2060.12,3051.46 2060.12,2729.49 R12.2 R6.2 R9.1
NetM2_1: M2.1 R17.2 R19.1 R20.2 TP7.1 | length 757.1
  Top Layer w40: TP7.1 2776.65,3050 2780.28,3053.62 M2.1 2780.28,2775.71 2723.94,2719.37 R20.2 R17.2 2815.32,2719.06 2914.69,2719.06 R19.1
NetQ2_1: Q2.1 R44.1 | length 328
  Top Layer w20: Q2.1 4232.6,1093.43 4256.03,1070 4387.83,1070 4448.98,1131.14 R44.1
NetQ2_3: Q2.3 R38.1 R39.1 | length 229
  Top Layer w20: Q2.3 R39.1
  Top Layer w40: R38.1 R39.1
NetR1_2: R1.2 R3.1 | length 110
  Bottom Layer w40: R1.2 R3.1
NetR2_2: R2.2 R5.1 | length 140
  Bottom Layer w40: R5.1 R2.2
NetR3_2: R3.2 R8.1 | length 110
  Bottom Layer w40: R3.2 R8.1
NetR5_2: R5.2 R11.1 | length 140.4
  Bottom Layer w20: R5.2 R5.2@1444.49,2834.49 ; R11.1@1444.49,2695.51 R11.1
  Bottom Layer w40: R11.1@1444.49,2695.51 R5.2@1444.49,2834.49
NetR8_2: R8.2 R13.1 | length 110
  Bottom Layer w40: R8.2 R13.1
NetR11_2: R11.2 R15.1 | length 156.6
  Bottom Layer w20: R11.2 R11.2@1569.04,2693.01 ; R15.1@1569.04,2541.99 R15.1@1571.02,2540
  Bottom Layer w40: R15.1@1569.04,2541.99 R11.2@1569.04,2693.01
NetR21_2: R21.2 R24.1 | length 110.4
  Top Layer w20: R24.1 6195.51,1788.46 6304.49,1788.46 R21.2
NetR24_2: R24.2 R25.1 | length 110
  Top Layer w20: R25.1 R24.2
NetR25_2: R25.2 R26.1 R27.1 | length 209.2
  Top Layer w20: R27.1 R25.2 6084.69,1788.66 6084.69,1690.31 R26.1
NetR28_2: R28.2 RV1.3 | length 806.4
  Top Layer w20: R28.2 5823.92,1715 5828.92,1710 v1(5830,1710)
  Bottom Layer w20: v1(5830,1710) 5865.96,1674.04 5865.96,1672.42 6006.24,1532.13 6178.35,1360.03 6178.35,1188.35 RV1.3
NetR29_1: R29.1 R32.2 U3.8 | length 719.3
  Top Layer w20: U3.8 5571.46,1275 5626.46,1220 R29.1 5685.63,1171.72 5697.35,1160 5813.28,1160 5825,1171.72 5825,1440.43 5764.37,1501.06 R32.2@5764.37,1505
NetR29_2: R29.2 R31.1 U3.9 | length 272.5
  Top Layer w20: U3.9 5546.69,1323.19 5677.44,1323.19 R31.1 5685.63,1311.06 5750.75,1245.94 5750.75,1233.62 R29.2
NetR30_2: R30.2 RV1.1 RV1.2 U3.13 | length 941.1
  Top Layer w20: U3.13 5613.27,1525 5629.23,1540.97 5629.23,1549.23 v1(5630,1550)
  Bottom Layer w20: v1(5630,1550) 5630,1619.8 R30.2@5676.26,1666.06 ; RV1.2 RV1.1 6008.44,1340 5711.38,1637.06 5711.38,1638.82 5697.76,1652.44 5689.88,1652.44 R30.2@5676.26,1666.06 ; R30.2@5676.26,1666.06 5676.26,1673.94 R30.2@5676.26,1666.06
NetR33_1: R33.1 R34.2 R40.1 U3.10 | length 676.9
  Top Layer w20: U3.10 5546.69,1376.81 5617.73,1376.81 5630.92,1390 v1(5632,1390) ; v1@5630.69,1391.31 5631.23,1390.77 5633.85,1390.77 5635.52,1392.44 5672.01,1392.44 5672.01,1395.93 5685.63,1409.55 R34.2 ; v1(5870,1390) 5870.77,1390.77 5900.33,1390.77 6005.63,1496.06 R40.1 R33.1
  Bottom Layer w20: v1(5632,1390) 5633.08,1390 5635.08,1392 5809.33,1392 5811.33,1390 v1(5870,1390)
NetR35_1: R35.1 R37.2 U3.6 | length 259.4
  Top Layer w20: R37.2 5239.41,1354.96 5270.04,1354.96 5299.55,1325.45 5349.55,1325.45 U3.6 5351.81,1326.81 5380,1326.81 5404.17,1350.98 v1(5405.25,1350.98)
  Bottom Layer w20: v1(5405.25,1350.98) 5405.44,1350.79 5405.44,1295.19 R35.1
NetR36_2: R36.2 R37.1 | length 100
  Top Layer w20: R36.2 R37.1
NetR38_2: R38.2 R39.2 VCT1.7 | length 995
  Top Layer w40: VCT1.7 3736.02,1471.02 R38.2 R39.2
NetVCT1_8: VCT1.8 VCT1.9 | length 1209.6
  Bottom Layer w40: VCT1.9 3410,2204.23 3550,2064.23 3550,1330 VCT1.8
ref: C20.1 R45.1 R48.2 TP13.1 U3.5 | length 958.2
  Top Layer w20: C20.1 5230.85,1462.08 5243.98,1448.95 5266.05,1448.95 5284.23,1430.77 5284.23,1415.77 v1(5285,1415) 5285,1395 5303.19,1376.81 5348.19,1376.81 U3.5
  Bottom Layer w20: v1(5285,1415) v1(5285,1955) R48.2 R45.1 R45.1@5420.63,1851.06
Vbus: C5.1 J2.1 J2.2 JP1.2 JP2.2 R2.1 | length 3187.7
  Top Layer w20: 1500,3595 1540,3635
  Top Layer w110: 1540,3635 1675,3770 2897.25,3770 2903.2,3764.06 2945.94,3764.06 JP1.2
  Top Layer w118: C5.1 1540,3402.68 1540,3635 ; 1550,3645 JP2.2
  Bottom Layer w20: R2.1@1427.83,2950 1443.98,2966.14 R2.1 ; 1457.17,3340 1479.84,3362.68 C5.1
  Bottom Layer w40: J2.1 1160.12,2965.12 1187.76,2965.12 1197.64,2975 R2.1
  Bottom Layer w118: J2.1 J2.2 1145,3270.88 1214.12,3340 1477.32,3340 C5.1
Vcc: C8.1 C9.2 C12.1 D6.1 J5.1 JP5.2 R22.2 R42.2 RV2.1 U1.3 | length 5766.6
  Top Layer w20: JP5.2 4582.48,1615.32 4680,1517.8 4680,1145 4735,1090 v1(5175,1090) ; v2(7000,1730) v2@7003.39,1730 ; D6.1@7063.39,1670 D6.1
  Top Layer w40: v2@7003.39,1730 D6.1@7063.39,1670 ; v2(7347.29,2013.84) 7410.07,2013.84 7416.23,2020 7570,2020 7695,2145 7808.18,2145 7846.33,2106.85 J5.1 ; 7433.5,2037.27 7433.5,2109.8 C8.1
  Bottom Layer w20: R22.2 5150,1296.06 5136.38,1282.44 5101.72,1282.44 5090,1270.73 5090,1150 5150,1090 v1(5175,1090) 6155,1090 ; R42.2 6506.69,1376.06 6436.06,1376.06 RV2.1 6155,1095 6155,1090 ; v2(7000,1730) 7000,1285 6805,1090 6155,1090 ; v2(7347.29,2013.84) v2@7349.49,2016.04 ; C12.1@7349.49,2147.8 C12.1
  Bottom Layer w40: v2(7000,1730) U1.3@7000,1813.19 ; U1.3 7158.73,1825.28 v2(7347.29,2013.84) ; v2@7349.49,2016.04 C12.1@7349.49,2147.8 ; C9.2 7718.13,2034.82 7777.97,2034.82 J5.1
Vo: Co1.1 Co2.1 Co3.1 Co4.1 J1.1 J1.2 JP3.1 R21.1 | length 5405.8
  Top Layer w20: R21.1 6296.14,1910 6280.55,1925.59 6280.55,1934.45 5930,2285 5930,3165 6020,3255 6170,3255 6290,3135 6290,2835 6330,2795 7046.85,2795 Co1.1
  Bottom Layer w118: Co1.1 Co2.1@7575,2878.15 ; JP3.1 7134.94,3740 7135,3739.94 Co4.1 7140,3515 Co3.1 7765,3515 J1.2 J1.1 7995,3040 7838.15,2883.15 Co2.1
y: R28.1 R35.2 TP11.1 U3.14 | length 831.5
  Top Layer w20: U3.14 5568.19,1575 5570,1576.81 v1(5570,1630) 5642.78,1702.78 5683.41,1702.78 R28.1@5685.63,1705 ; TP11.1 5650,1809.39 5681.26,1778.13 R28.1
  Bottom Layer w20: R35.2 5484.37,1298.94 5539.72,1354.29 5574.29,1354.29 5598,1378 5598,1602 v1@5570.77,1629.23
pads on no net: L1.10 TR1.2 TR1.4 TR1.5 TR1.6 TR1.7 TR1.8 TR1.11 TR1.14 U2.2 U2.4

## Polygon pours and split planes (outlines as drawn)
i- on Top Layer "I-_L01_P004" (solid, pour order 4): 3965,1000 3965,1495 4205,1735 4205,1740 4905,1740 5240,2075 5780,2075 5870,2165 5870,2380 8099.82,2380 8095,1005
i- on Top Layer "I-_L01_P005" (solid, pour order 5): 6030,3770 6030,3710 6030,2515 6095,2515 6170,2440 7035,2440 7035,2625 7235,2825 8100,2825 8100,3840 6050,3840
i- on Bottom Layer "I-_L02_P001" (solid, pour order 1): 3965,1000 3965,1500 4210,1745 4900,1745 5235,2080 5785,2080 5870,2165 5870,2380 8100,2367.77 8100,1000
i- on Bottom Layer "I-_L02_P006" (solid, pour order 6): 6010.43,2515 6095,2515 6170,2440 7035,2440 7035,2625 7235,2825 8100,2825 8100,3840 6030.43,3840

## Keep-outs
Keep-Out Layer:
  the board outline again, w10

## Text inside footprints (layer, text, board x,y; h text height)
D4: Mechanical 10 "K" at 2310.12,1876.42 h39.37; Top Overlay "K" at 2310.12,1876.42 h39.37
D7: Mechanical 10 "K" at 2005.12,1839.96 h39.37; Top Overlay "K" at 2005.12,1839.96 h39.37
J2: Top Overlay "VBUS" at 1081.24,2789.73 h50
VCT1: Top Overlay "*" at 3347.63,1183.31 h39.37; Top Overlay "*" at 3885,1840.4 h39.37; Top Overlay "*" at 3310,2140.4 h39.37; Top Overlay "*" at 3235,1840.4 h39.37; Top Overlay "*" at 3135,1915.4 h39.37